# Altium PCB PCB1.PcbDoc
Units mil, origin at the board's own origin, x right, y up, seen from the top; angles counter-clockwise.
Board outline 6000 x 4000 mil, 2 copper layers (Top Layer, Bottom Layer); 60 components, 66 nets, 361 pads, 0 vias.
Unrouted connection lines stored in the file: 188.
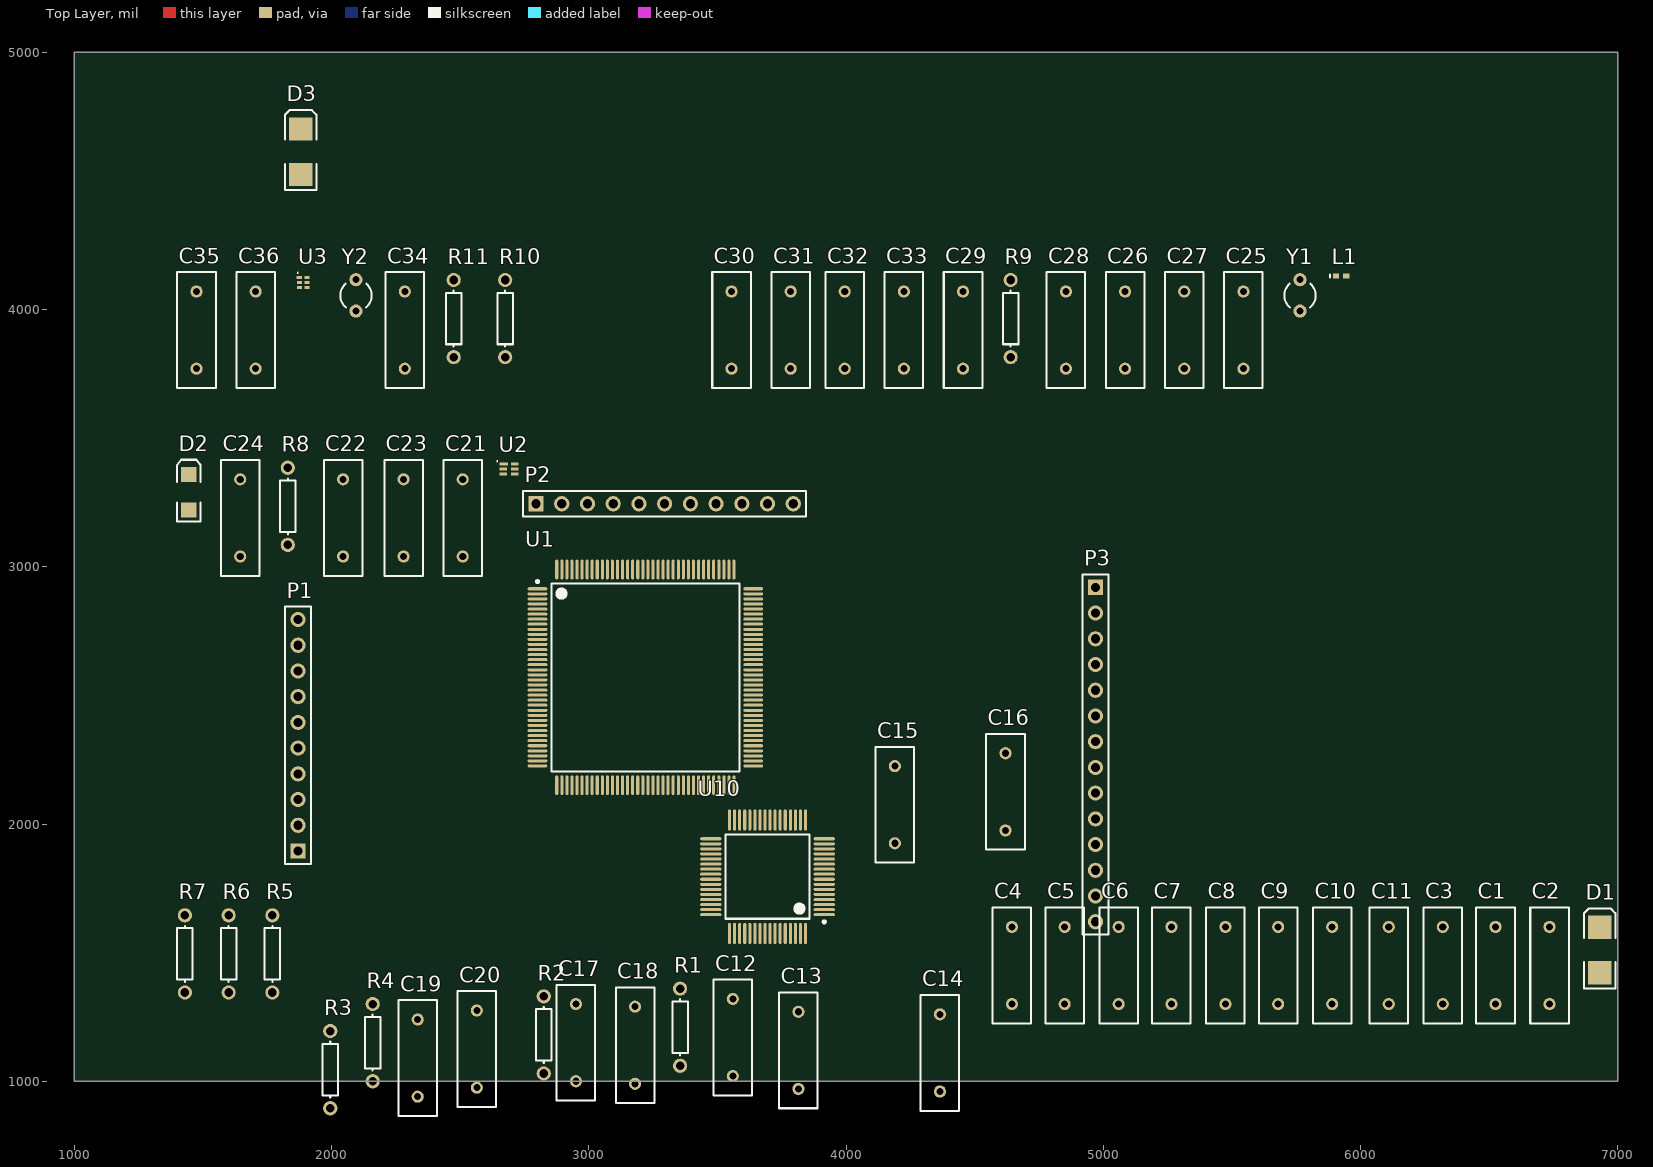
[diagram p0: Top Layer view]
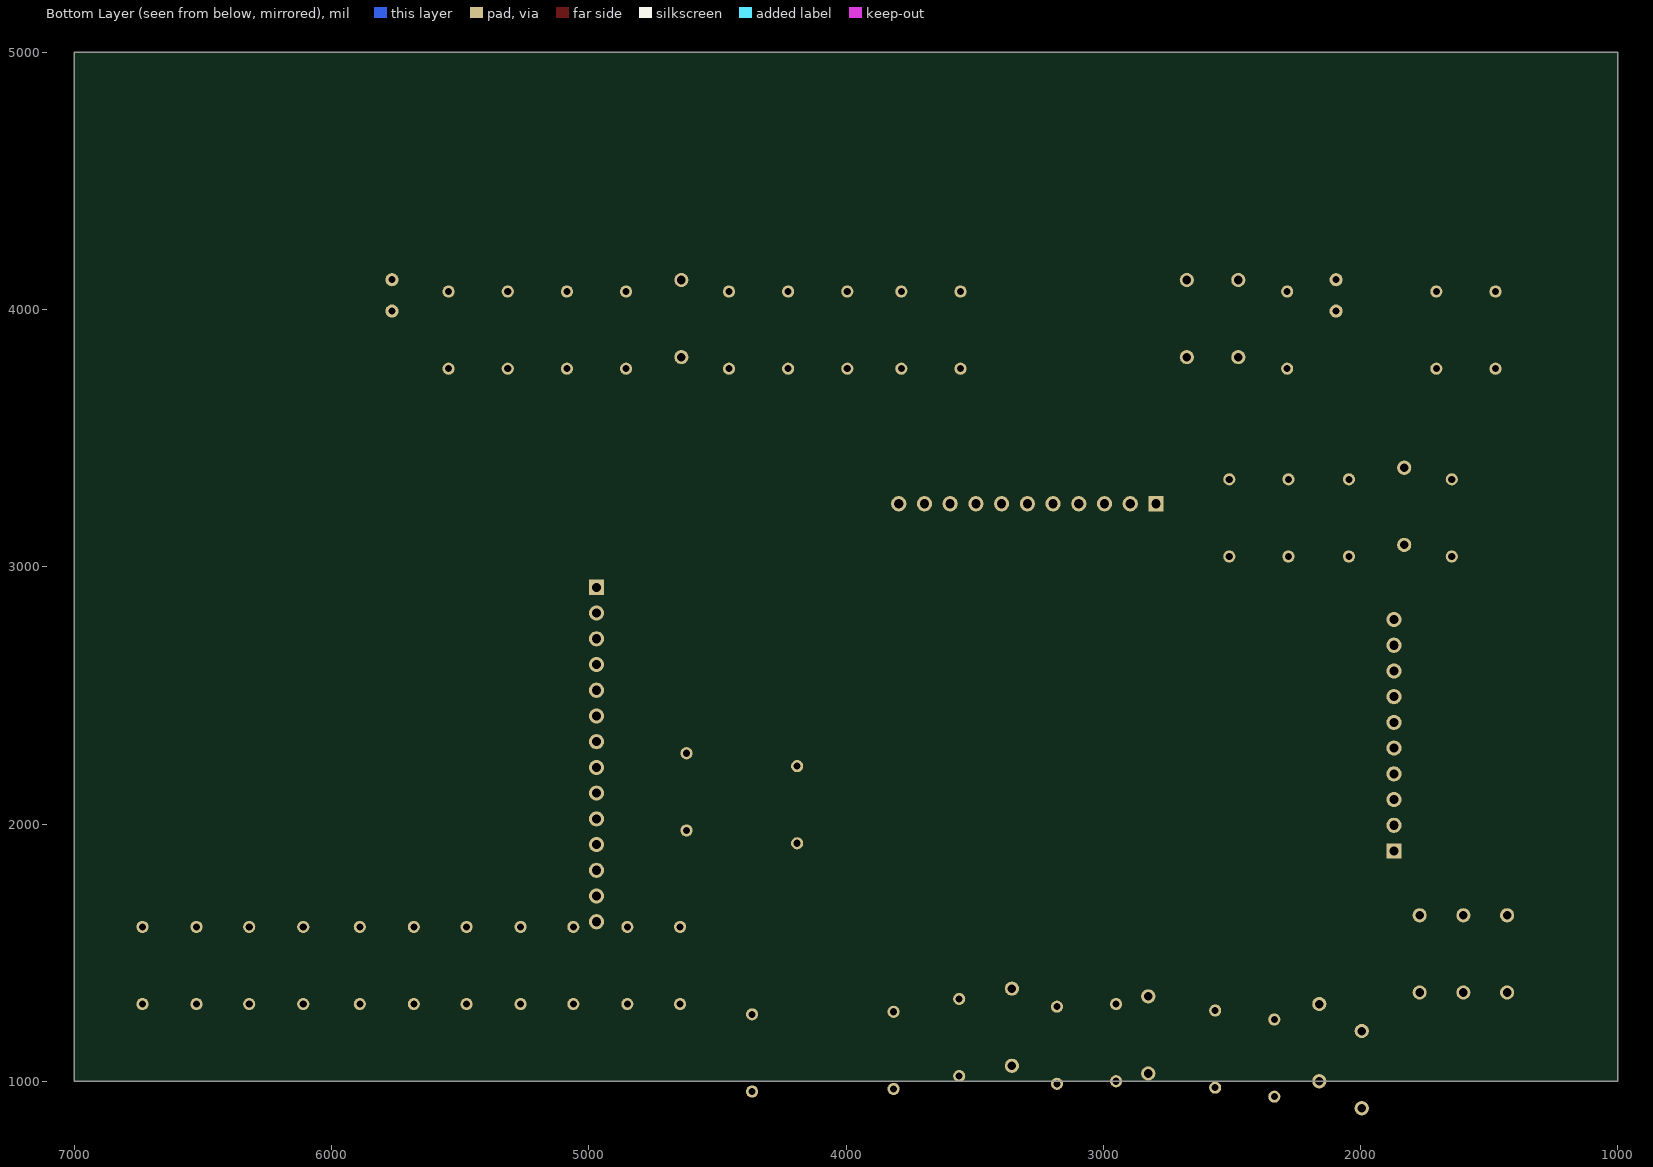
[diagram p1: Bottom Layer view, seen from below]

## Layer stack, top to bottom
Top Solder: solder mask 0.4, Solder Resist, Dk 3.5
Top Layer: signal copper 1.4
Dielectric 1: dielectric 12.6, FR-4, Dk 4.8
Bottom Layer: signal copper 1.4
Bottom Solder: solder mask 0.4, Solder Resist, Dk 3.5

## Board outline
1000,1000 7000,1000 7000,5000 1000,5000

## Design rules (kind name [scope] priority, off if disabled: settings)
Clearance [All] p1: gap=10
PolygonConnect [All] p1: connectstyle=Relief reliefconductorwidth=10 reliefentries=4 polygonreliefangle="90 Angle" airgapwidth=10
RoutingVias [All] p1: holewidth=28 width=50 viastyle="Through Hole" minholewidth=28 minwidth=50 maxholewidth=28 maxwidth=50
SolderMaskExpansion [All] p1: expansion=4
Width [All] p1: maxlimit=10 minlimit=10 preferedwidth=10
30 further rules are at their usual default settings.

## Classes and differential pairs
component class Toplevel: CN1 D3 P1 P2 P3
component class STM32F4: C25 C26 C27 C28 C29 C30 C31 C32 C33 C34 C35 C36 L1 R9 R10 R11 U3 U10 Y1 Y2
component class Power: C21 C22 C23 C24 D2 R8 U2
component class ICE40: C1 C2 C3 C4 C5 C6 C7 C8 C9 C10 C11 C12 C13 C14 C15 C16 C17 C18 C19 C20 D1 R1 R2 R3 R4 R5 R6 R7
component class ICE40IO: U1

## Components (designator, comment, footprint, x,y, rotation, side; value= is the part's Value field where it differs from the comment)
C1 "Cap" RAD-0.3 6525,1450 r90 top
C2 "Cap" RAD-0.3 6735,1450 r90 top
C3 "Cap" RAD-0.3 6320,1450 r90 top
C4 "Cap" RAD-0.3 4645,1450 r90 top
C5 "Cap" RAD-0.3 4850,1450 r90 top
C6 "Cap" RAD-0.3 5060,1450 r90 top
C7 "Cap" RAD-0.3 5265,1450 r90 top
C8 "Cap" RAD-0.3 5475,1450 r90 top
C9 "Cap" RAD-0.3 5680,1450 r90 top
C10 "Cap" RAD-0.3 5890,1450 r90 top
C11 "Cap" RAD-0.3 6110,1450 r90 top
C12 "Cap" RAD-0.3 3560,1170 r90 top
C13 "Cap" RAD-0.3 3815,1120 r90 top
C14 "Cap" RAD-0.3 4365,1110 r90 top
C15 "Cap" RAD-0.3 4190,2075 r90 top
C16 "Cap" RAD-0.3 4620,2125 r90 top
C17 "Cap" RAD-0.3 2950,1150 r90 top
C18 "Cap" RAD-0.3 3180,1140 r90 top
C19 "Cap" RAD-0.3 2335,1090 r90 top
C20 "Cap" RAD-0.3 2565,1125 r90 top
C21 "Cap" RAD-0.3 2510,3190 r90 top
C22 "Cap" RAD-0.3 2045,3190 r90 top
C23 "Cap" RAD-0.3 2280,3190 r90 top
C24 "Cap" RAD-0.3 1645,3190 r90 top
C25 "Cap" RAD-0.3 5545,3920 r90 top
C26 "Cap" RAD-0.3 5085,3920 r90 top
C27 "Cap" RAD-0.3 5315,3920 r90 top
C28 "Cap" RAD-0.3 4855,3920 r90 top
C29 "Cap" RAD-0.3 4455,3920 r90 top
C30 "Cap" RAD-0.3 3555,3920 r90 top
C31 "Cap" RAD-0.3 3785,3920 r90 top
C32 "Cap" RAD-0.3 3995,3920 r90 top
C33 "Cap" RAD-0.3 4225,3920 r90 top
C34 "Cap" RAD-0.3 2285,3920 r90 top
C35 "Cap" RAD-0.3 1475,3920 r90 top
C36 "Cap" RAD-0.3 1705,3920 r90 top
D1 "D Schottky" SMB 6930,1510 r90 top
D2 "LED2" 3.2X1.6X1.1 1445,3290 r90 top
D3 "D Schottky" SMB 1880,4613.58 r90 top
L1 "Inductor" 0402-A 5925,4130 r0 top
P1 "Header 10" HDR1X10 1870,1895 r90 top
P2 "Header 11" HDR1X11 2795,3245 r0 top
P3 "Header 14" HDR1X14 4970,2920 r270 top
R1 "Res1" AXIAL-0.3 3355,1210 r90 top
R2 "Res1" AXIAL-0.3 2825,1180 r90 top
R3 "Res1" AXIAL-0.3 1995,1045 r90 top
R4 "Res1" AXIAL-0.3 2160,1150 r90 top
R5 "Res1" AXIAL-0.3 1770,1495 r90 top
R6 "Res1" AXIAL-0.3 1600,1495 r90 top
R7 "Res1" AXIAL-0.3 1430,1495 r90 top
R8 "Res1" AXIAL-0.3 1830,3235 r90 top
R9 "Res1" AXIAL-0.3 4640,3965 r90 top
R10 "Res1" AXIAL-0.3 2675,3965 r90 top
R11 "Res1" AXIAL-0.3 2475,3965 r90 top
U1 "ICE40HX4K-TQ144" LATC-TQFP-144_M 3220,2570 r0 top
U2 "TLV7111233DSER" TI-DSE6_V 2690,3380 r0 top
U3 "TPD4S012DRYR" DRY6 1890,4105 r0 top
U10 "MCU_LQFP64" STM-LQFP64_M 3695,1795 r180 top
Y1 "XTAL" R38 5765,4055 r0 top
Y2 "XTAL" R38 2095,4055 r0 top

## Footprints (in the part's own frame and the unit in brackets; to place one, negate y for a bottom-side part, rotate by r counter-clockwise, add the part's x,y. Pads: shape width x height; smd on the part's side, far side on the other; paste and mask are expansions set on the pad)
3.2X1.6X1.1 [mm] "SMT LED; 2 Flat Leads"
  rect 1.5x1.5 smd: 1(-1.75,0) 2(1.75,0)
  silkscreen extent -2.9,-1.15 3.2,1.15
0402-A [mm] "Chip Inductor, Body 1.0x0.5mm, IPC High Density"
  rect 0.6x0.5 smd: 1(-0.5,0) 2(0.5,0)
  silkscreen extent -1.1,-0.15 -1.1,0.15, body extent -0.55,-0.3 0.55,0.3, height 0.55
AXIAL-0.3 [mm] "Axial Device, Thru-Hole; 2 Leads; 0.3 in Pin Spacing"
  round 1.4 hole 0.85: 1(-3.81,0) 2(3.81,0)
  silkscreen extent -2.77,-0.76 2.77,0.76
DRY6 [mm] "PSON, 6-Leads, Body 1x1.45mm, Pitch 0.5mm, TI Recommended"
  rect 0.52x0.3 smd paste+0 mask+0.05: 1(-0.385,0.5)
  rect 0.49x0.3 smd paste+0 mask+0.05: 2(-0.385,0) 3(-0.385,-0.5) 4(0.385,-0.5) 5(0.385,0) 6(0.385,0.5)
  silkscreen extent -0.57,0.9 -0.48,1, body extent -0.53,-0.75 0.53,0.75, height 0.6
HDR1X10 [mm] "Connector; Header; 10 Position"
  rect 1.5x1.5 hole 0.9: 1(0,0)
  round 1.5 hole 0.9: 2(2.54,0) 3(5.08,0) 4(7.62,0) 5(10.16,0) 6(12.7,0) 7(15.24,0) 8(17.78,0) 9(20.32,0) 10(22.86,0)
  silkscreen extent -1.27,-1.27 24.13,1.27
HDR1X11 [mm] "Connector; Header; 11 Position"
  rect 1.5x1.5 hole 0.9: 1(0,0)
  round 1.5 hole 0.9: 2(2.54,0) 3(5.08,0) 4(7.62,0) 5(10.16,0) 6(12.7,0) 7(15.24,0) 8(17.78,0) 9(20.32,0) 10(22.86,0) 11(25.4,0)
  silkscreen extent -1.27,-1.27 26.67,1.27
HDR1X14 [mm] "Connector; Header; 14 Position"
  rect 1.5x1.5 hole 0.9: 1(0,0)
  round 1.5 hole 0.9: 2(2.54,0) 3(5.08,0) 4(7.62,0) 5(10.16,0) 6(12.7,0) 7(15.24,0) 8(17.78,0) 9(20.32,0) 10(22.86,0) 11(25.4,0) 12(27.94,0) 13(30.48,0) 14(33.02,0)
  silkscreen extent -1.27,-1.27 34.29,1.27
LATC-TQFP-144_M [mm] "QFP, 144-Leads, Body 20x20mm, Pitch 0.5mm, IPC Low Density"
  oval 1.95x0.3 smd: 1(-10.65,8.75) 2(-10.65,8.25) 3(-10.65,7.75) 4(-10.65,7.25) 5(-10.65,6.75) 6(-10.65,6.25) 7(-10.65,5.75) 8(-10.65,5.25) 9(-10.65,4.75) 10(-10.65,4.25) 11(-10.65,3.75) 12(-10.65,3.25) 13(-10.65,2.75) 14(-10.65,2.25) 15(-10.65,1.75) 16(-10.65,1.25) 17(-10.65,0.75) 18(-10.65,0.25) 19(-10.65,-0.25) 20(-10.65,-0.75) 21(-10.65,-1.25) 22(-10.65,-1.75) 23(-10.65,-2.25) 24(-10.65,-2.75) 25(-10.65,-3.25) 26(-10.65,-3.75) 27(-10.65,-4.25) 28(-10.65,-4.75) 29(-10.65,-5.25) 30(-10.65,-5.75) 31(-10.65,-6.25) 32(-10.65,-6.75) 33(-10.65,-7.25) 34(-10.65,-7.75) 35(-10.65,-8.25) 36(-10.65,-8.75) 73(10.65,-8.75) 74(10.65,-8.25) 75(10.65,-7.75) 76(10.65,-7.25) 77(10.65,-6.75) 78(10.65,-6.25) 79(10.65,-5.75) 80(10.65,-5.25) 81(10.65,-4.75) 82(10.65,-4.25) 83(10.65,-3.75) 84(10.65,-3.25) 85(10.65,-2.75) 86(10.65,-2.25) 87(10.65,-1.75) 88(10.65,-1.25) 89(10.65,-0.75) 90(10.65,-0.25) 91(10.65,0.25) 92(10.65,0.75) 93(10.65,1.25) 94(10.65,1.75) 95(10.65,2.25) 96(10.65,2.75) 97(10.65,3.25) 98(10.65,3.75) 99(10.65,4.25) 100(10.65,4.75) 101(10.65,5.25) 102(10.65,5.75) 103(10.65,6.25) 104(10.65,6.75) 105(10.65,7.25) 106(10.65,7.75) 107(10.65,8.25) 108(10.65,8.75)
  oval 0.3x1.95 smd: 37(-8.75,-10.65) 38(-8.25,-10.65) 39(-7.75,-10.65) 40(-7.25,-10.65) 41(-6.75,-10.65) 42(-6.25,-10.65) 43(-5.75,-10.65) 44(-5.25,-10.65) 45(-4.75,-10.65) 46(-4.25,-10.65) 47(-3.75,-10.65) 48(-3.25,-10.65) 49(-2.75,-10.65) 50(-2.25,-10.65) 51(-1.75,-10.65) 52(-1.25,-10.65) 53(-0.75,-10.65) 54(-0.25,-10.65) 55(0.25,-10.65) 56(0.75,-10.65) 57(1.25,-10.65) 58(1.75,-10.65) 59(2.25,-10.65) 60(2.75,-10.65) 61(3.25,-10.65) 62(3.75,-10.65) 63(4.25,-10.65) 64(4.75,-10.65) 65(5.25,-10.65) 66(5.75,-10.65) 67(6.25,-10.65) 68(6.75,-10.65) 69(7.25,-10.65) 70(7.75,-10.65) 71(8.25,-10.65) 72(8.75,-10.65) 109(8.75,10.65) 110(8.25,10.65) 111(7.75,10.65) 112(7.25,10.65) 113(6.75,10.65) 114(6.25,10.65) 115(5.75,10.65) 116(5.25,10.65) 117(4.75,10.65) 118(4.25,10.65) 119(3.75,10.65) 120(3.25,10.65) 121(2.75,10.65) 122(2.25,10.65) 123(1.75,10.65) 124(1.25,10.65) 125(0.75,10.65) 126(0.25,10.65) 127(-0.25,10.65) 128(-0.75,10.65) 129(-1.25,10.65) 130(-1.75,10.65) 131(-2.25,10.65) 132(-2.75,10.65) 133(-3.25,10.65) 134(-3.75,10.65) 135(-4.25,10.65) 136(-4.75,10.65) 137(-5.25,10.65) 138(-5.75,10.65) 139(-6.25,10.65) 140(-6.75,10.65) 141(-7.25,10.65) 142(-7.75,10.65) 143(-8.25,10.65) 144(-8.75,10.65)
  silkscreen extent -10.77,-9.28 9.28,9.57, body extent -10,-10 10,10, height 1.6
R38 [mm] "Crystal, Thru-Hole; 2 Leads; Body 3.1 x 8.2 mm (Dia.xH)"
  round 1.3 hole 0.7: 1(0,1.55) 2(0,-1.55)
  silkscreen extent -1.55,-1.19 1.55,1.17
RAD-0.3 [mm] "Radial Cap, Thru-Hole; 2 Leads; 0.3 in Pin Spacing"
  round 1.2 hole 0.7: 1(-3.81,0) 2(3.81,0)
  silkscreen extent -5.71,-1.91 5.71,1.91
SMB [mm] "DO-214-AA/SMB; 2 C-Bend Leads; Body 5.3 x 3.6 mm, inc. leads (LxW)"
  rect 2.3x2.3 smd: 1(-2.25,0) 2(2.25,0)
  silkscreen extent -3.8,-1.55 4.1,1.55
STM-LQFP64_M [mm] "Thin QFP, 64-Leads, Body 10x10mm, Pitch 0.5mm, IPC Low Density"
  oval 2.1x0.3 smd: 1(-5.6,3.75) 2(-5.6,3.25) 3(-5.6,2.75) 4(-5.6,2.25) 5(-5.6,1.75) 6(-5.6,1.25) 7(-5.6,0.75) 8(-5.6,0.25) 9(-5.6,-0.25) 10(-5.6,-0.75) 11(-5.6,-1.25) 12(-5.6,-1.75) 13(-5.6,-2.25) 14(-5.6,-2.75) 15(-5.6,-3.25) 16(-5.6,-3.75) 33(5.6,-3.75) 34(5.6,-3.25) 35(5.6,-2.75) 36(5.6,-2.25) 37(5.6,-1.75) 38(5.6,-1.25) 39(5.6,-0.75) 40(5.6,-0.25) 41(5.6,0.25) 42(5.6,0.75) 43(5.6,1.25) 44(5.6,1.75) 45(5.6,2.25) 46(5.6,2.75) 47(5.6,3.25) 48(5.6,3.75)
  oval 0.3x2.1 smd: 17(-3.75,-5.6) 18(-3.25,-5.6) 19(-2.75,-5.6) 20(-2.25,-5.6) 21(-1.75,-5.6) 22(-1.25,-5.6) 23(-0.75,-5.6) 24(-0.25,-5.6) 25(0.25,-5.6) 26(0.75,-5.6) 27(1.25,-5.6) 28(1.75,-5.6) 29(2.25,-5.6) 30(2.75,-5.6) 31(3.25,-5.6) 32(3.75,-5.6) 49(3.75,5.6) 50(3.25,5.6) 51(2.75,5.6) 52(2.25,5.6) 53(1.75,5.6) 54(1.25,5.6) 55(0.75,5.6) 56(0.25,5.6) 57(-0.25,5.6) 58(-0.75,5.6) 59(-1.25,5.6) 60(-1.75,5.6) 61(-2.25,5.6) 62(-2.75,5.6) 63(-3.25,5.6) 64(-3.75,5.6)
  silkscreen extent -5.72,-4.15 4.15,4.57, body extent -5,-5 5,5, height 1.6
TI-DSE6_V [mm] "SON, 6-Leads, Body 1.5x1.5mm, Pitch 0.5mm"
  rect 0.85x0.28 smd: 1(-0.525,0.5)
  rect 0.75x0.28 smd: 2(-0.575,0) 3(-0.575,-0.5) 4(0.575,-0.5) 5(0.575,0) 6(0.575,0.5)
  silkscreen extent -1.22,0.73 -1.12,0.82, body extent -0.75,-0.75 0.75,0.75, height 0.8

## Part data
C1 C2 C3 C4 C5 C6 C7 C8 C9 C10 C11 C12 C13 C14 C15 C16 C17 C18 C19 C20 C21 C22 C23 C24 C25 C26 C27 C28 C29 C30 C31 C32 C33 C34 C35 C36: "Capacitor"
D1 D3: "Schottky Diode"
D2: "Typical RED, GREEN, YELLOW, AMBER GaAs LED"
P1: "Header, 10-Pin"
P2: "Header, 11-Pin"
P3: "Header, 14-Pin"
R1 R2 R3 R4 R5 R6 R7 R8 R9 R10 R11: "Resistor"
U1: "iCE40 HX4K Series FPGA Family, 3520 Logic Cells, 1.2 V Core, 80 K Embedded RAM Bits, 144-pin TQFP, Pb-Free, Tray"
U2: "Dual Output High PSRR LDO, 200 mA, Fixed 1.2, 3.3 V Output, 2 to 5.5 V Input, 6-pin WSON (DSE), -40 to 125 degC, Green (RoHS & no Sb/Br)"
U3: "USB ESD Solution with Power Clamp, 4 Channels, -40 to +85 degC, 6-pin SON (DRY), Green (RoHS & no Sb/Br)"
Y1 Y2: "Crystal Oscillator"

## Nets (pads, with @x,y where several pads share a name; then routed paths per layer and width w, separated by ;. In a path a pad name is that pad's centre, name@x,y a point inside that pad or via, vN(x,y) a via of type N, cw(c..) or ccw(c..) an arc to the next point about the centre after c; other vN are vias at no path point)
1V2: C12.1 C13.1 C14.1 C15.1 C16.1 C21.2 P3.1 R1.1 R2.1 U1.27 U1.40 U1.92 U1.111 U2.6
3V3: C1.1 C2.1 C3.1 C4.1 C5.1 C6.1 C7.1 C8.1 C9.1 C10.1 C11.1 C24.2 C29.1 C30.1 C31.1 C32.1 C33.1 D1.1 L1.1 P3.2 R3.2 R4.2 R5.2 R6.2 R7.2 R8.2 U1.6 U1.30 U1.46 U1.57 U1.72 U1.89 U1.100 U1.123 U1.131 U2.5 U10.1 U10.19 U10.32 U10.48 U10.64
5V: C22.1 C23.2 D3.2 P3.3 U2.1 U2.2 U2.3 U3.6
A3V3: C25.1 L1.2 U10.13
GND: C1.2 C2.2 C3.2 C12.2 C13.2 C14.2 C15.2 C16.2 C21.1 C22.2 C23.1 C24.1 C25.2 C26.2 C27.2 C28.2 C29.2 C30.2 C31.2 C32.2 C33.2 C34.2 C35.2 C36.2 D2.2 P2.11 P3.14 R9.1 U1.5 U1.13 U1.14 U1.59 U1.69 U1.86 U1.103 U1.132 U1.140 U2.4 U3.4 U10.12 U10.18 U10.31 U10.47 U10.63
NetC4_2: C4.2 C5.2 C6.2 C7.2 C8.2 C9.2 C10.2 C11.2
NetC17_1: C17.1 C18.1 R1.2 U1.54
NetC17_2: C17.2 C18.2 U1.53
NetC19_1: C19.1 C20.1 R2.2 U1.126
NetC19_2: C19.2 C20.2 U1.127
NetC26_1: C26.1 U10.5 Y1.1
NetC27_1: C27.1 U10.6 Y1.2
NetC28_1: C28.1 P3.13 U10.7
NetC34_1: C34.1 U10.30
NetC35_1: C35.1 U10.4 Y2.1
NetC36_1: C36.1 U10.3 Y2.2
NetCN1_1: D3.1
NetD1_2: D1.2 U1.108
NetD2_1: D2.1 R8.1
NetP1_1: P1.1 U1.34
NetP1_2: P1.2 U1.33
NetP1_3: P1.3 U1.32
NetP1_4: P1.4 U1.31
NetP1_5: P1.5 U1.29
NetP1_6: P1.6 U1.28
NetP1_7: P1.7 U1.26
NetP1_8: P1.8 U1.25
NetP1_9: P1.9 U1.24
NetP1_10: P1.10 U1.23
NetP2_1: P2.1 U1.144
NetP2_2: P2.2 U1.143
NetP2_3: P2.3 U1.142
NetP2_4: P2.4 U1.141
NetP2_5: P2.5 U1.139
NetP2_6: P2.6 U1.138
NetP2_7: P2.7 U1.137
NetP2_8: P2.8 U1.136
NetP2_9: P2.9 U1.135
NetP2_10: P2.10 U1.134
NetP3_4: P3.4 U10.49
NetP3_5: P3.5 U10.46
NetP3_6: P3.6 U10.38
NetP3_7: P3.7 U10.37
NetP3_8: P3.8 U10.36
NetP3_9: P3.9 U10.35
NetP3_10: P3.10 U10.34
NetP3_11: P3.11 U10.33
NetP3_12: P3.12 R9.2 U10.60
NetR3_1: R3.1 U1.66 U10.15
NetR4_1: R4.1 U1.65 U10.14
NetR5_1: R5.1 U1.68 U10.23
NetR6_1: R6.1 U1.70 U10.21
NetR7_1: R7.1 U1.71 U10.20
NetR10_1: R10.1 U10.44
NetR11_1: R11.1 U10.45
NetU1_63: U1.63 U10.16
NetU1_64: U1.64 U10.17
NetU1_67: U1.67 U10.22
NetU1_73: U1.73 U10.55
NetU1_74: U1.74 U10.56
NetU1_75: U1.75 U10.57
NetU1_76: U1.76 U10.58
NetU1_78: U1.78 U10.59
NetU1_79: U1.79 U10.61
USBD+: R11.2 U3.1
USBD-: R10.2 U3.2
pads on no net: U1.1 U1.2 U1.3 U1.4 U1.7 U1.8 U1.9 U1.10 U1.11 U1.12 U1.15 U1.16 U1.17 U1.18 U1.19 U1.20 U1.21 U1.22 U1.35 U1.36 U1.37 U1.38 U1.39 U1.41 U1.42 U1.43 U1.44 U1.45 U1.47 U1.48 U1.49 U1.50 U1.51 U1.52 U1.55 U1.56 U1.58 U1.60 U1.61 U1.62 U1.77 U1.80 U1.81 U1.82 U1.83 U1.84 U1.85 U1.87 U1.88 U1.90 U1.91 U1.93 U1.94 U1.95 U1.96 U1.97 U1.98 U1.99 U1.101 U1.102 U1.104 U1.105 U1.106 U1.107 U1.109 U1.110 U1.112 U1.113 U1.114 U1.115 U1.116 U1.117 U1.118 U1.119 U1.120 U1.121 U1.122 U1.124 U1.125 U1.128 U1.129 U1.130 U1.133 U3.3 U3.5 U10.2 U10.8 U10.9 U10.10 U10.11 U10.24 U10.25 U10.26 U10.27 U10.28 U10.29 U10.39 U10.40 U10.41 U10.42 U10.43 U10.50 U10.51 U10.52 U10.53 U10.54 U10.62